# Altium PCB 32-041PCB图（源文件格式）.PcbDoc
Units mil, origin at the board's own origin, x right, y up, seen from the top; angles counter-clockwise.
Board outline 3930 x 3915 mil, 2 copper layers (Top Layer, Bottom Layer); 18 components, 49 nets, 109 pads, 0 vias.
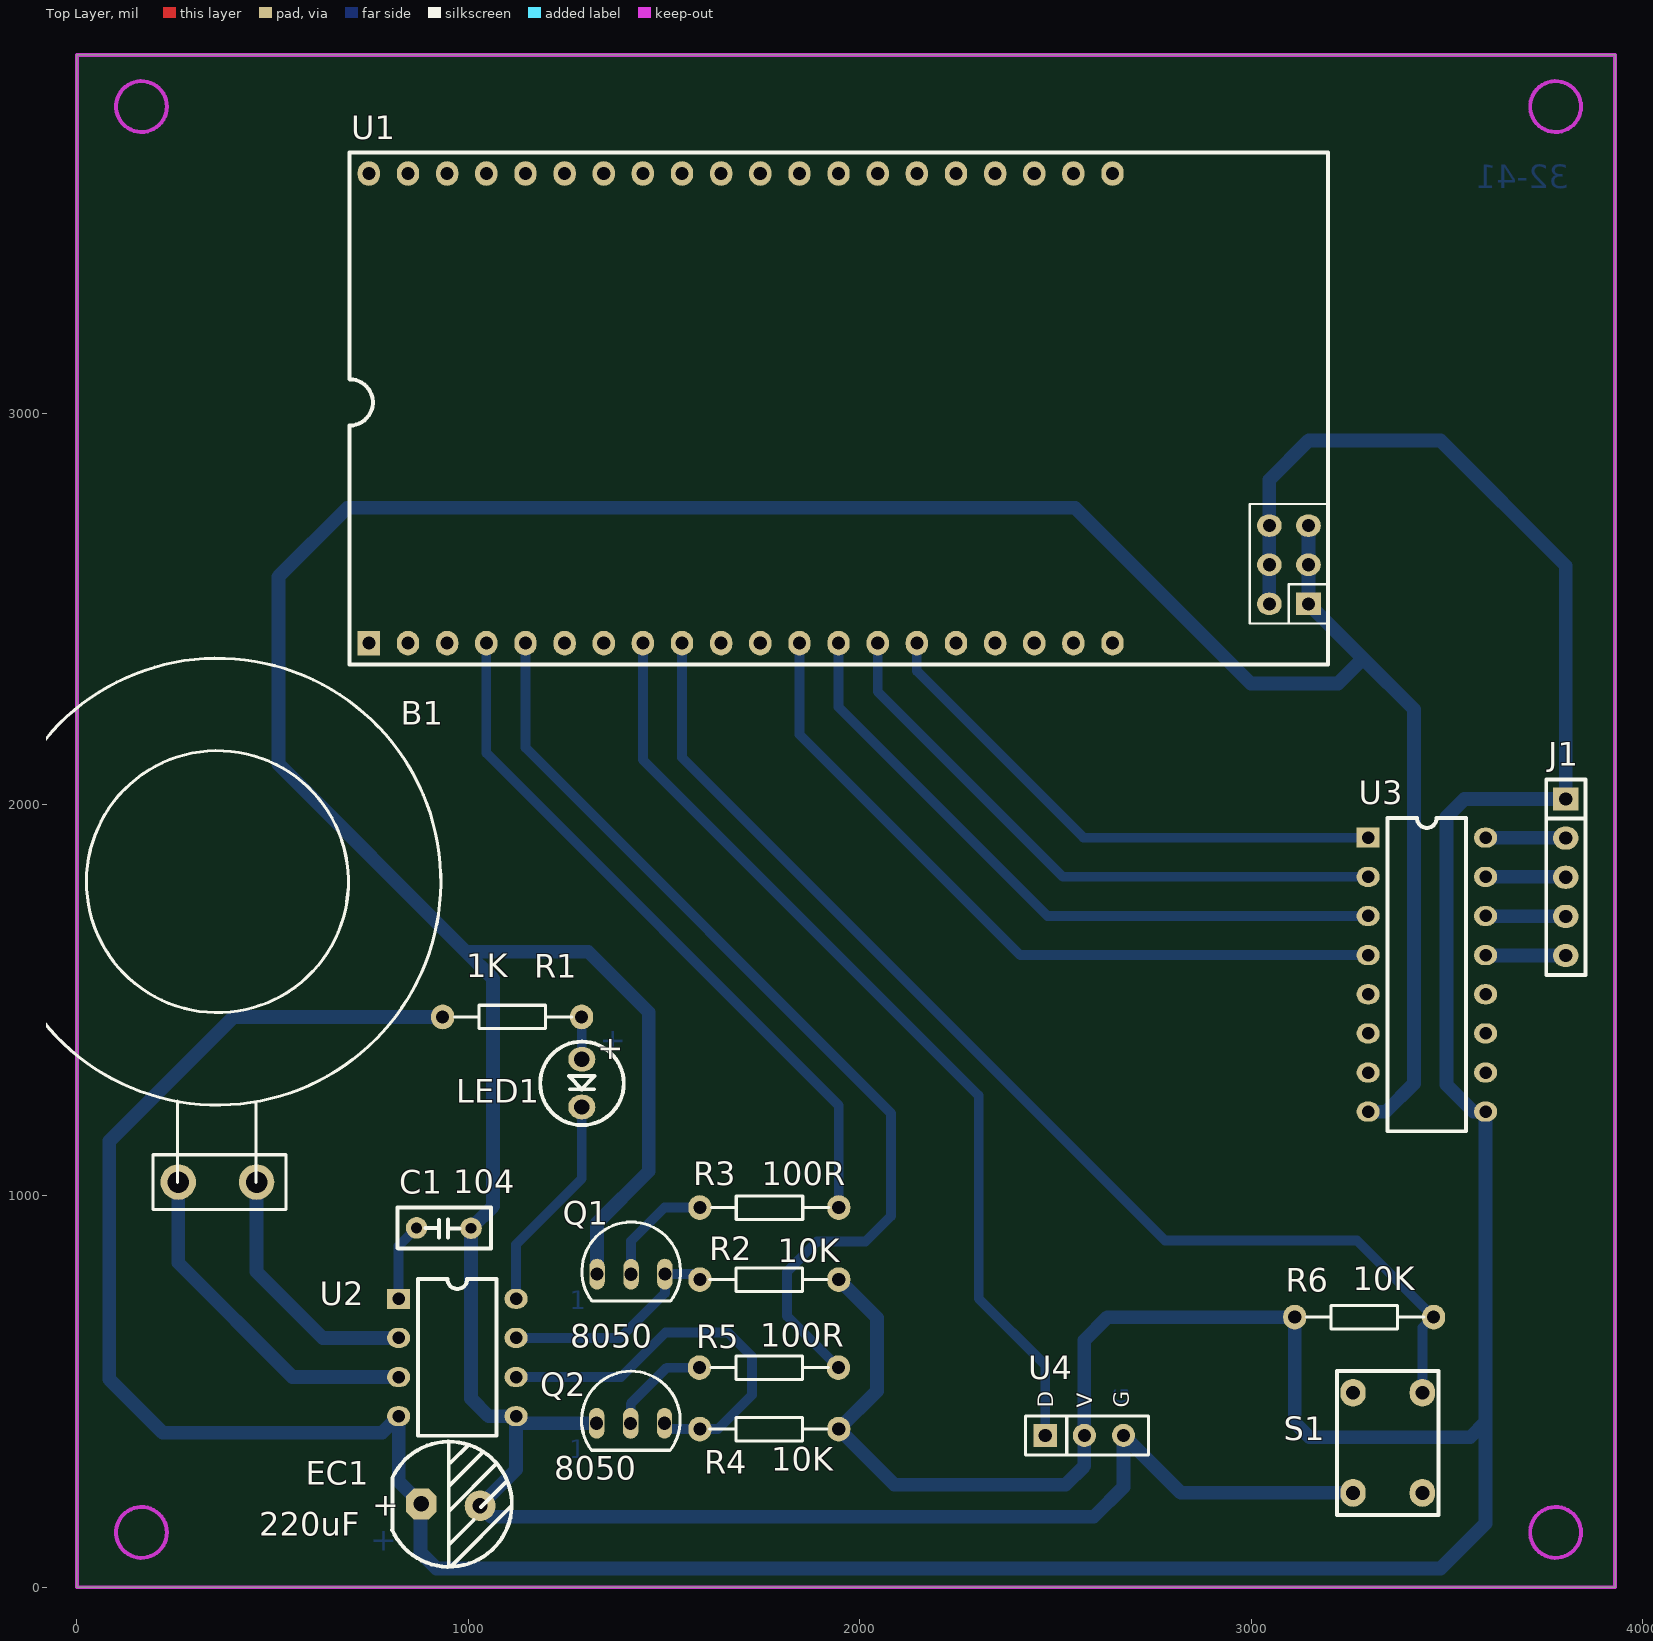
[diagram p0: Top Layer view]
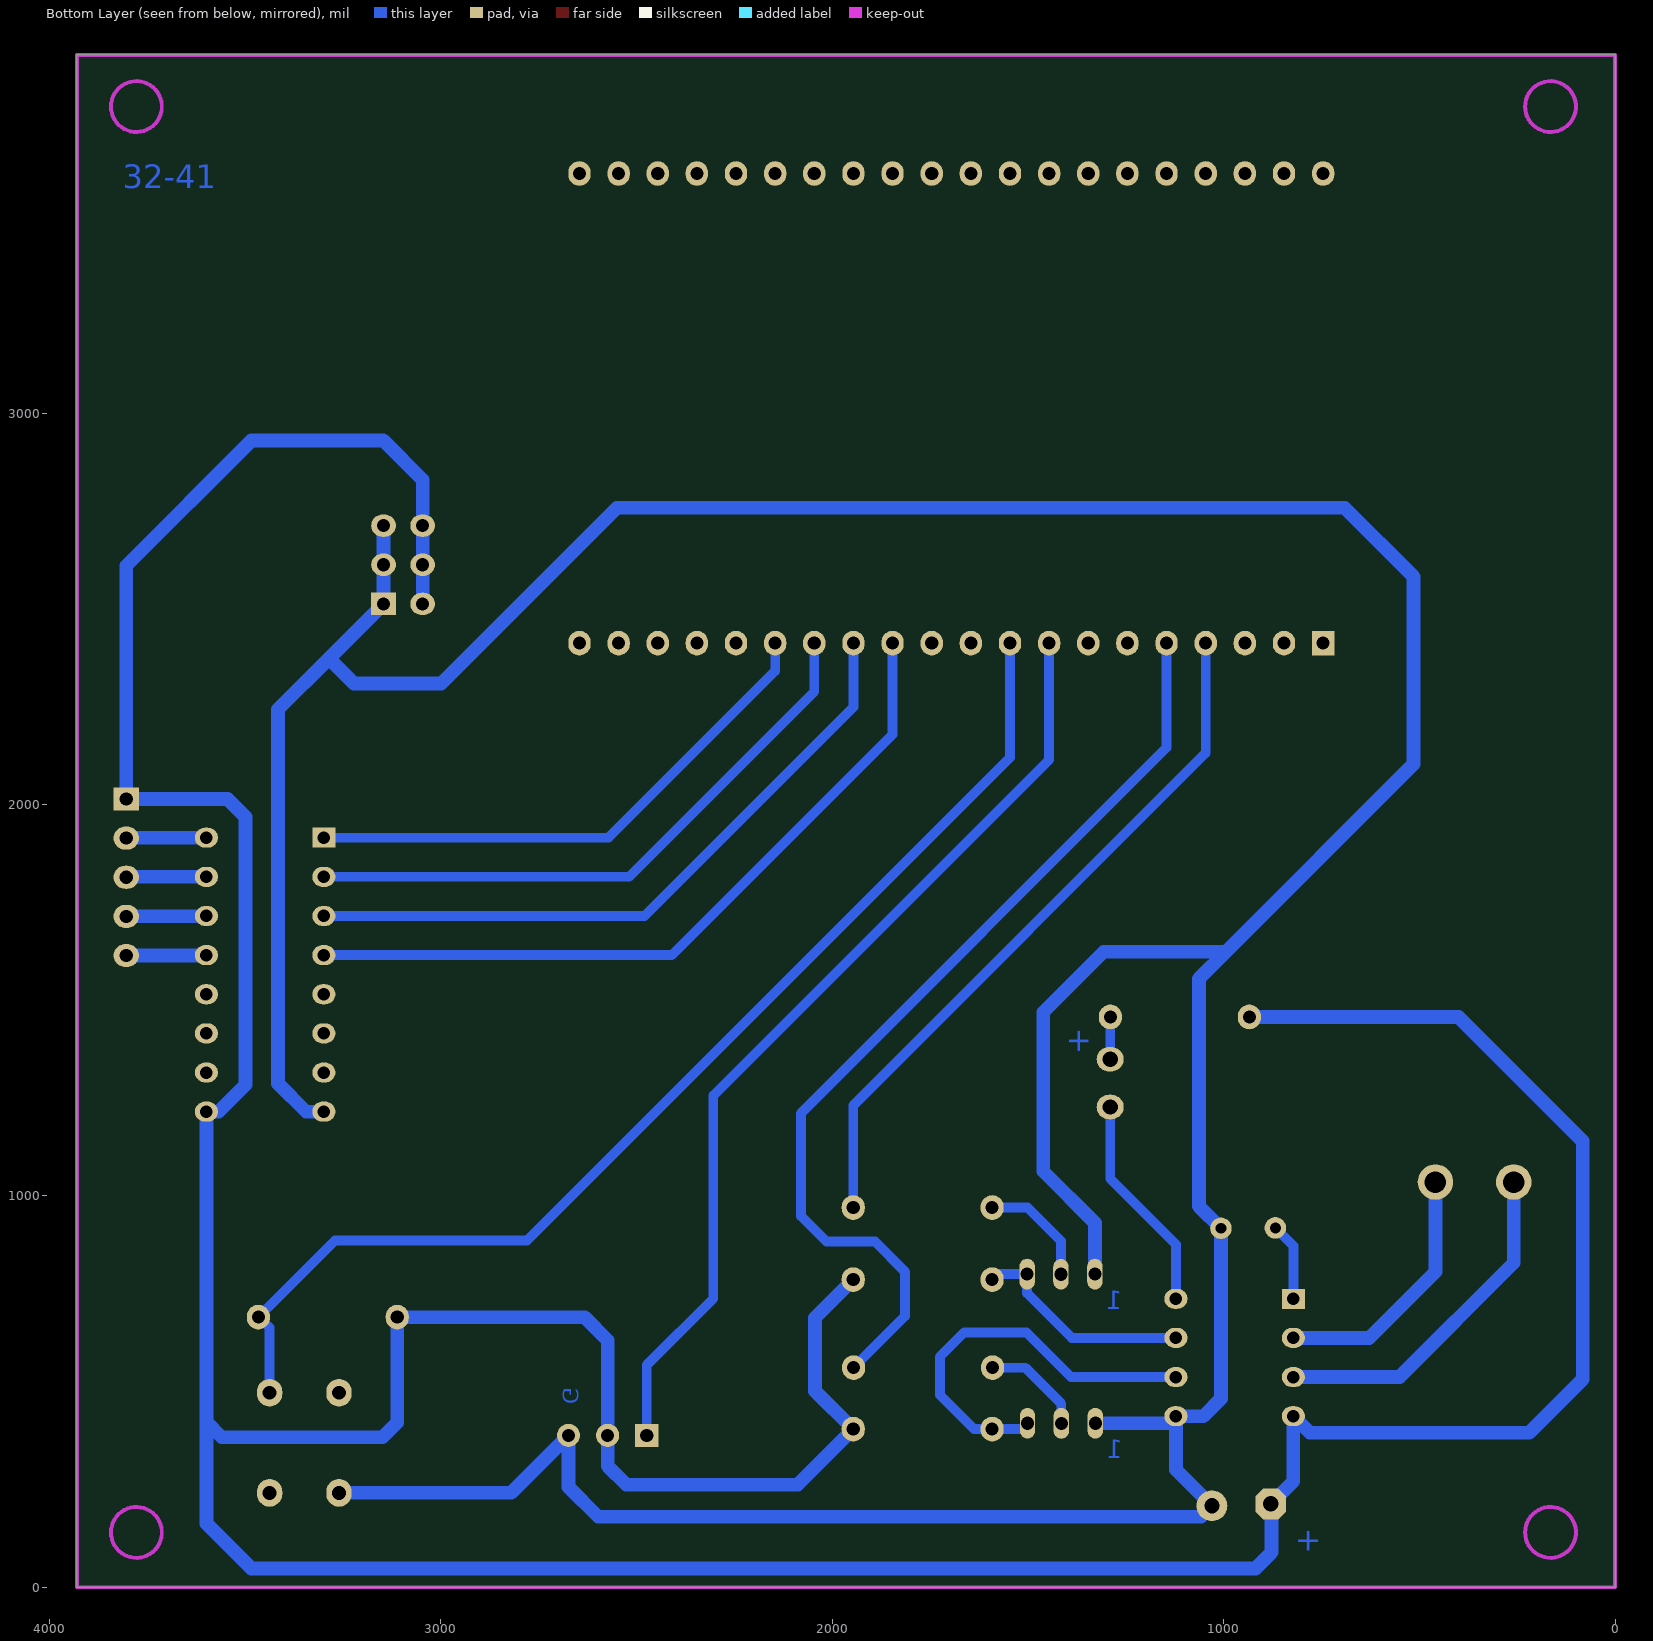
[diagram p1: Bottom Layer view, seen from below]

## Layer stack, top to bottom
Top Solder: solder mask 0.4, Solder Resist, Dk 3.5
Top Layer: signal copper 1.4
Dielectric1: dielectric 12.6, FR-4, Dk 4.8
Bottom Layer: signal copper 1.4
Bottom Solder: solder mask 0.4, Solder Resist, Dk 3.5

## Board outline
0,0 0,3915 3930,3915 3930,0

## Design rules (kind name [scope] priority, off if disabled: settings)
Clearance [All] p1: gap=12
ComponentClearance [All] p1 off: gap=10 collisioncheckmode=3 verticalgap=10 showdistances=FALSE
FabricationTestpoint [(IsPad And (OnTopLayer Or OnBottomLayer))] p1: side=3 testpointundercomponent=TRUE minsize=40 maxsize=100 preferedsize=60 minholesize=0 maxholesize=40 preferedholesize=32 testpointgrid=1 allowsidetop=TRUE allowsidebottom=TRUE usegrid=TRUE gridtolerance=0.01
Height [All] p1 off: minheight=0 maxheight=1000 prefheight=500
HoleSize [All] p1 off: absolutevalues=TRUE maxlimit=100 minlimit=1 maxpercent=80.000 minpercent=20.000
LayerPairs [All] p1 off: enforce=TRUE
PlaneClearance [All] p1 off: clearance=20
PlaneConnect [All] p1 off: planeconnectstyle=Relief reliefexpansion=20 reliefentries=4 reliefconductorwidth=10 reliefairgap=10
PolygonConnect [All] p1 off: connectstyle=Relief reliefconductorwidth=10 reliefentries=4 polygonreliefangle="90 Angle" airgapwidth=10
RoomDefinition 41、基于STM32单片机自动门迎客门语音播报设计 [InComponentClass('41、基于STM32单片机自动门迎客门语音播报设计')] p1 off: confinementstyle=ConfineIn formatcopy=TRUE lockcomponents=FALSE outline 3975,55 5306,55 5306,589 3975,589
RoutingVias [All] p1: holewidth=28 width=50 viastyle="Through Hole" minholewidth=28 minwidth=50 maxholewidth=28 maxwidth=50
SilkToSolderMaskClearance SilkscreenOverComponentPads [IsPad] p1: minsilkscreentomaskgap=10 clearancetoexposedcopper=TRUE
SolderMaskExpansion [All] p1: expansion=4
Width [All] p1: maxlimit=100 minlimit=12 preferedwidth=20
22 further rules are at their usual default settings.

## Classes and differential pairs
component class 41、基于STM32单片机自动门迎客门语音播报设计: B1 C1 EC1 J1 LED1 Q1 Q2 R1 R3 R4 R5 R6 S1 U1 U2 U3 U4

## Components (designator, comment, footprint, x,y, rotation, side; value= is the part's Value field where it differs from the comment)
B1 "喇叭" 喇叭 459,1035 r90 top
C1 "104" RAD-0.1 1007,917 r180 top
EC1 "220uF" RB.15/.3 880,213 r0 top
J1 "步进电机" SIP5-2.54 3804,2014 r270 top
LED1 "RED" LED_D3MM12 1290,1349 r270 top
Q1 "8050" TO-92 1329,800 r0 top
Q2 "8050" TO-92 1328,419 r0 top
R1 "1K" AXIAL0.3 1112,1457 r180 top
R2 "10K" AXIAL0.3 1769,786 r0 top
R3 "100R" AXIAL0.3 1769,970 r180 top
R4 "10K" AXIAL0.3 1769,404 r0 top
R5 "100R" AXIAL0.3 1768,561 r180 top
R6 "10K" AXIAL0.3 3289,690 r180 top
S1 "BUTTOM" BUTTOM_6x6DIP 3349,369 r270 top
U1 "STM32_CORE" STM32_CORE 746,2412 r90 top
U2 "NY3P065BP8" DIP8 822,737 r0 top
U3 "ULN2003" DIP16 3299,1915 r0 top
U4 "避障红外接口" 红外接口 2474,388 r90 top

## Footprints (in the part's own frame and the unit in brackets; to place one, negate y for a bottom-side part, rotate by r counter-clockwise, add the part's x,y. Pads: shape width x height; smd on the part's side, far side on the other; paste and mask are expansions set on the pad)
AXIAL0.3 [mm]
  oval 1.5x1.6 hole 0.85: 1(-4.508,0) 2(4.508,0)
  silkscreen extent -3.87,-0.76 3.75,0.76
BUTTOM_6x6DIP [mm]
  oval 1.8x1.65 hole 0.9: 1(-3.25,2.25) 2(3.25,-2.25) ""(-3.25,-2.25) ""(3.25,2.25)
  round 1 on Top Overlay: 3(0,0)
  silkscreen extent -4.67,-3.3 4.67,3.3
DIP8 [mm]
  rect 1.5x1.3 hole 0.813: 1(0,0)
  oval 1.5x1.3 hole 0.813: 2(0,-2.54) 3(0,-5.08) 4(0,-7.62) 5(7.62,-7.62) 6(7.62,-5.08) 7(7.62,-2.54) 8(7.62,0)
  silkscreen extent 1.27,-8.89 6.35,1.27
DIP16 [mm]
  rect 1.5x1.3 hole 0.813: 1(0,0)
  oval 1.5x1.3 hole 0.813: 2(0,-2.54) 3(0,-5.08) 4(0,-7.62) 5(0,-10.16) 6(0,-12.7) 7(0,-15.24) 8(0,-17.78) 9(7.62,-17.78) 10(7.62,-15.24) 11(7.62,-12.7) 12(7.62,-10.16) 13(7.62,-7.62) 14(7.62,-5.08) 15(7.62,-2.54) 16(7.62,0)
  silkscreen extent 1.27,-19.05 6.35,1.27
LED_D3MM12 [mm]
  oval 1.6x1.75 hole 1: 1(0,0) 2(3.1,0)
  silkscreen extent -1.14,-2.7 4.28,2.72
RAD-0.1 [mm]
  round 1.4 hole 0.7: 1(0,0) 2(3.531,-0.025)
  silkscreen extent -1.3,-1.35 4.78,1.32
RB.15/.3 [mm]
  oct 2x2 hole 1: 1(-0.002,-0.004)
  round 2 hole 1: 2(3.81,-0.127)
  silkscreen extent -1.89,-4.09 5.87,4.04
SIP5-2.54 [mm]
  rect 1.5x1.65 hole 0.85: 1(0,0)
  oval 1.5x1.65 hole 0.85: 2(2.54,0) 3(5.08,0) 4(7.62,0) 5(10.16,0)
  silkscreen extent -1.27,-1.27 11.43,1.27
STM32_CORE [mm]
  rect 1.6x1.45 hole 0.85: 1(0,0)
  oval 1.6x1.45 hole 0.85: 2(0,-2.54) 3(0,-5.08) 4(0,-7.62) 5(0,-10.16) 6(0,-12.7) 7(0,-15.24) 8(0,-17.78) 9(0,-20.32) 10(0,-22.86) 11(0,-25.4) 12(0,-27.94) 13(0,-30.48) 14(0,-33.02) 15(0,-35.56) 16(0,-38.1) 17(0,-40.64) 18(0,-43.18) 19(0,-45.72) 20(0,-48.26) 21(30.48,-48.26) 22(30.48,-45.72) 23(30.48,-43.18) 24(30.48,-40.64) 25(30.48,-38.1) 26(30.48,-35.56) 27(30.48,-33.02) 28(30.48,-30.48) 29(30.48,-27.94) 30(30.48,-25.4) 31(30.48,-22.86) 32(30.48,-20.32) 33(30.48,-17.78) 34(30.48,-15.24) 35(30.48,-12.7) 36(30.48,-10.16) 37(30.48,-7.62) 38(30.48,-5.08) 39(30.48,-2.54) 40(30.48,0)
  rect 1.45x1.6 hole 0.85: 41(2.55,-60.975)
  oval 1.45x1.6 hole 0.85: 42(2.55,-58.435) 43(5.09,-60.975) 44(5.09,-58.435) 45(7.63,-60.975) 46(7.63,-58.435)
  silkscreen extent -1.4,-62.25 31.84,1.27
TO-92 [mm]
  oval 1x2 hole 0.85: 1(0,0) 2(2.205,-0.009) 3(4.4,0)
  silkscreen extent -0.98,-1.75 5.42,3.38
喇叭 [mm]
  round 2.3 hole 1.4: 1(0,0) 2(0,5.08)
  silkscreen extent -1.78,-11.96 34,17.04
红外接口 [mm]
  rect 1.5x1.5 hole 0.85: 1(0,0)
  round 1.5 hole 0.85: 2(0,-2.54) 3(0,-5.08)
  silkscreen extent -1.27,-6.72 1.27,1.27

## Part data
C1: library part CAP, "无极性电容"
EC1: library part CAP_EC, "极性电容"
J1: "步进电机接口"
LED1: library part LED12, "LED灯"
Q1 Q2: library part 9013, "三极管"
R1 R2 R3 R4 R5 R6: library part RES, "电阻"
S1: "按键"
U1: "STM32核心板"
U2: "语音芯片"
U3: library part ULN2003A, "ULN2003оƬ"
U4: "避障红外探头模块"

## Nets (pads, with @x,y where several pads share a name; then routed paths per layer and width w, separated by ;. In a path a pad name is that pad's centre, name@x,y a point inside that pad or via, vN(x,y) a via of type N, cw(c..) or ccw(c..) an arc to the next point about the centre after c; other vN are vias at no path point)
GND: C1.1 EC1.2 Q1.1 Q2.1 S1.2 U1.41 U1.43 U1.45 U2.5 U3.8 U4.3 | length 11425.1
  Bottom Layer w35: Q2.1 1140,419 U2.5 ; Q1.1 1329,931 1461,1063 1461,1469 1306.5,1623.5 994.5,1623.5 ; U1.45 U1.43 U1.41 3286,2373 ; S1.2 2820.95,241.05 U4.3 2674,256 2598,180 1058,180 EC1.2 1122,300 U2.5 ; U3.8 3344,1215 3416,1287 3416,2243 3286,2373 ; 994.5,1623.5 1063,1555 1063,973 C1.1 1007,482 1052,437 U2.5 ; 994.5,1623.5 515,2103 515,2582 691,2758 2550,2758 2999,2309 3222,2309 3286,2373
NetB1_1: B1.1 U2.2 | length 662
  Bottom Layer w35: B1.1 459,806 628,637 U2.2
NetB1_2: B1.2 U2.3 | length 890
  Bottom Layer w35: B1.2 259,829 551,537 U2.3
NetC1_2: C1.2 U2.1 | length 200.1
  Bottom Layer w25: U2.1 822,872 C1.2
NetJ1_2: J1.2 U3.16 | length 205.4
  Bottom Layer w35: U3.16 3803,1915 J1.2
NetJ1_3: J1.3 U3.15 | length 205.4
  Bottom Layer w35: U3.15 3803,1815 J1.3
NetJ1_4: J1.4 U3.14 | length 205.4
  Bottom Layer w35: U3.14 3600,1714 J1.4
NetJ1_5: J1.5 U3.13 | length 205.4
  Bottom Layer w35: U3.13 3600,1614 J1.5
NetLED1_1: LED1.1 R1.1 | length 108.2
  Bottom Layer w25: R1.1 1290,1456.5 LED1.1
NetLED1_2: LED1.2 U2.8 | length 559.5
  Bottom Layer w25: U2.8 1122,876 1290,1044 LED1.2
NetQ1_2: Q1.2 R3.2 | length 296.1
  Bottom Layer w25: Q1.2 1415.81,884.81 1501,970 R3.2
NetQ1_3: Q1.3 R2.1 U2.7 | length 571.4
  Bottom Layer w25: U2.7 1388,637 1502.23,751.23 Q1.3 1577.5,800 R2.1
NetQ2_2: Q2.2 R5.2 | length 265
  Bottom Layer w25: Q2.2 1414.81,468.81 1507,561 R5.2 ; R5.2@1590.5,569 R5.2@1591.5,569
NetQ2_3: Q2.3 R4.1 U2.6 | length 1039.9
  Bottom Layer w25: U2.6 1390,537 1504,651 1663,651 1725,589 1725,491 1638,404 R4.1 1516.23,404 Q2.3
PA0: R3.1 U1.4 | length 1815
  Bottom Layer w25: U1.4 1046,2131 1946.5,1230.5 R3.1
PA1: R5.1 U1.5 | length 2475.2
  Bottom Layer w25: U1.5 1146,2145 2080,1211 2080,948 2015,883 1891,883 1814,806 1814,692.5 R5.1
PA2: U1.6
PA3: U1.7
PA4: U1.8 U4.1 | length 2449.8
  Bottom Layer w25: U1.8 1446,2114 2304,1256 2304,738 2474,568 U4.1
PA5: R6.1 S1.1 U1.9 | length 3010.6
  Bottom Layer w25: U1.9 1546,2120 1883,1783 2780.25,885.75 3270.75,885.75 R6.1@3465.25,691.25 ; S1.1 3437.58,663.58 R6.1@3465.25,691.25 ; R6.1 R6.1@3465.25,691.25
PA6: U1.10
PA7: U1.11
PA8: U1.12 U3.4 | length 1919.6
  Bottom Layer w25: U1.12 1846,2179 2410,1615 U3.4
PA9: U1.13 U3.3 | length 1737.2
  Bottom Layer w25: U1.13 1946,2249 2480,1715 U3.3
PA10: U1.14 U3.2 | length 1572.9
  Bottom Layer w25: U1.14 2046,2288 2519,1815 U3.2
PA11: U1.15 U3.1 | length 1400.5
  Bottom Layer w25: U1.15 2146,2341 2572,1915 U3.1
PA12: U1.16
PA15: U1.17
PB0: U1.24
PB1: U1.25
PB2: U1.26
PB3: U1.27
PB4: U1.28
PB5: U1.29
PB6: U1.30
PB7: U1.31
PB8: U1.32
PB9: U1.33
PB10: U1.34
PB11: U1.35
PB12: U1.36
PB13: U1.37
PB14: U1.38
PB15: U1.39
PC13: U1.1
PC14: U1.2
PC15: U1.3
VCC_3.3V: U1.40
VCC_5V: EC1.1 J1.1 R1.2 R2.2 R4.2 R6.2 U1.42 U1.44 U1.46 U2.4 U3.9 U4.2 | length 12438
  Bottom Layer w35: EC1.1 EC1.1@878,214.75 ; R1.2 400,1457 83,1140 83,531 219,395 780,395 U2.4 822,270.75 EC1.1@878,214.75 ; R2.2 2044,688.5 2044,501.5 R4.2 2088.5,262 2526,262 2574,310 U4.2 2574,631 2633,690 R6.2 3111.5,420.5 3149,383 3560,383 3599,422 ; U1.42 U1.44 U1.46 3046.6,2829.6 3147,2930 3484,2930 3804,2610 J1.1 3545,2014 3499,1968 3499,1284 3568,1215 U3.9 3599,422 ; EC1.1@878,214.75 878,89 919,48 3484,48 3599,163 3599,422
pads on no net: S1. S1.3 U1.18 U1.19 U1.20 U1.21 U1.22 U1.23 U3.5 U3.6 U3.7 U3.10 U3.11 U3.12

## Keep-outs
Keep-Out Layer:
  circle w10: c3778.04,140 r64.96
  circle w10: c3778.04,3783 r64.96
  circle w10: c165.04,3783 r64.96
  circle w10: c165.04,140 r64.96
  lines w10: 0,0 0,3915 3930,3915 3930,0 0,0

## Other copper
Bottom Layer:
  text "32-41" at 3813,3574 h60

## Dimensions
3930,3922 to 0,3915 on Top Overlay
-1,3907 to 6,-2 on Top Overlay

## Text inside footprints (layer, text, board x,y; h text height)
EC1: Bottom Layer "+" at 750,93 h60; Top Overlay "+" at 755,183 h60
LED1: Bottom Layer "+" at 1345,1429 h60 r270; Top Overlay "+" at 1338,1409 h60 r270
Q1: Bottom Layer "1" at 1259,710 h47.24
Q2: Bottom Layer "1" at 1258,329 h47.24
U4: Bottom Layer "G" at 2689,468 h40 r90; Top Overlay "G" at 2689,458 h40 r90; Top Overlay "D" at 2494,458 h40 r90; Top Overlay "V" at 2594,458 h40 r90